# Altium PCB gamekun_H7A3.PcbDoc (part 1 of 2)
Units mil, origin at the board's own origin, x right, y up, seen from the top; angles counter-clockwise.
Board outline 2995 x 3909 mil, 4 copper layers (Top Layer, Layer 1, Layer 2, Bottom Layer), stack 23.756 mil thick; 100 components, 120 nets, 610 pads, 229 vias.
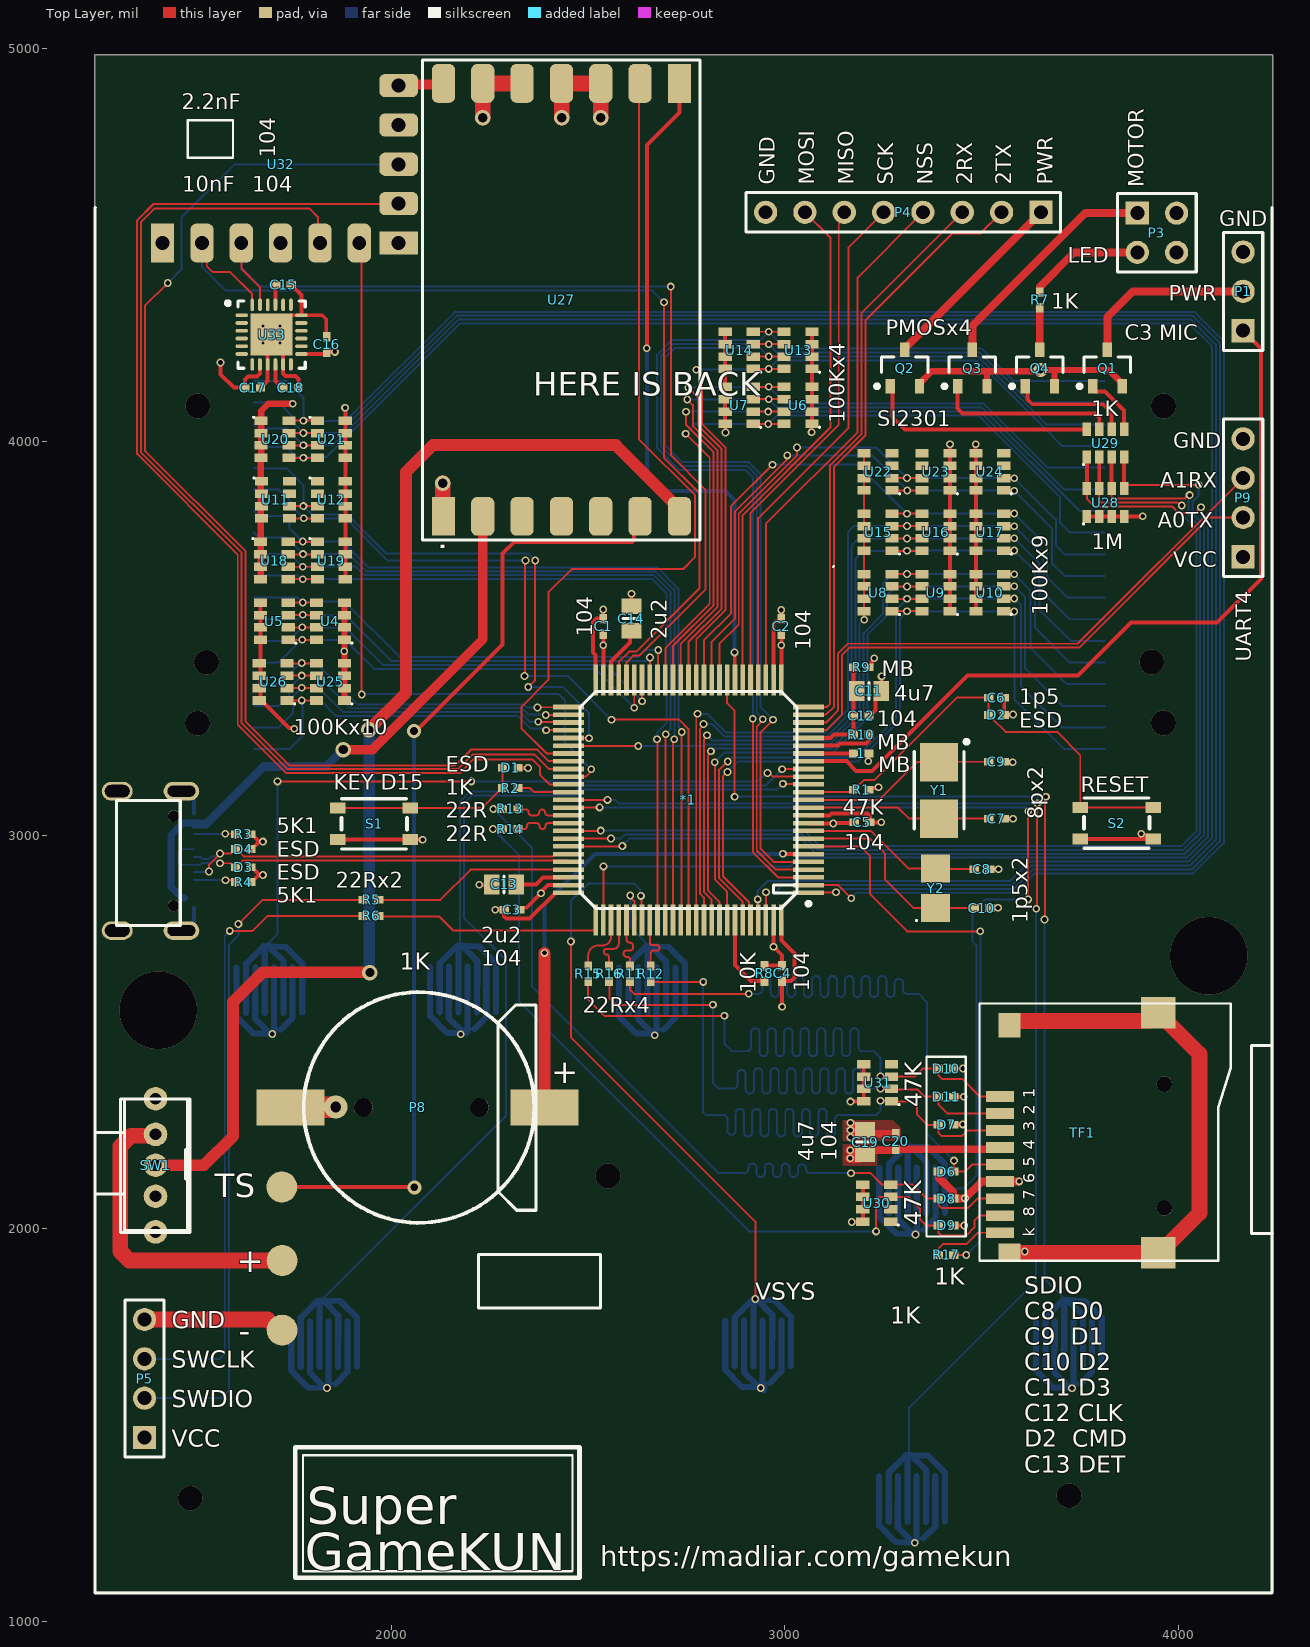
[diagram p0: Top Layer view]
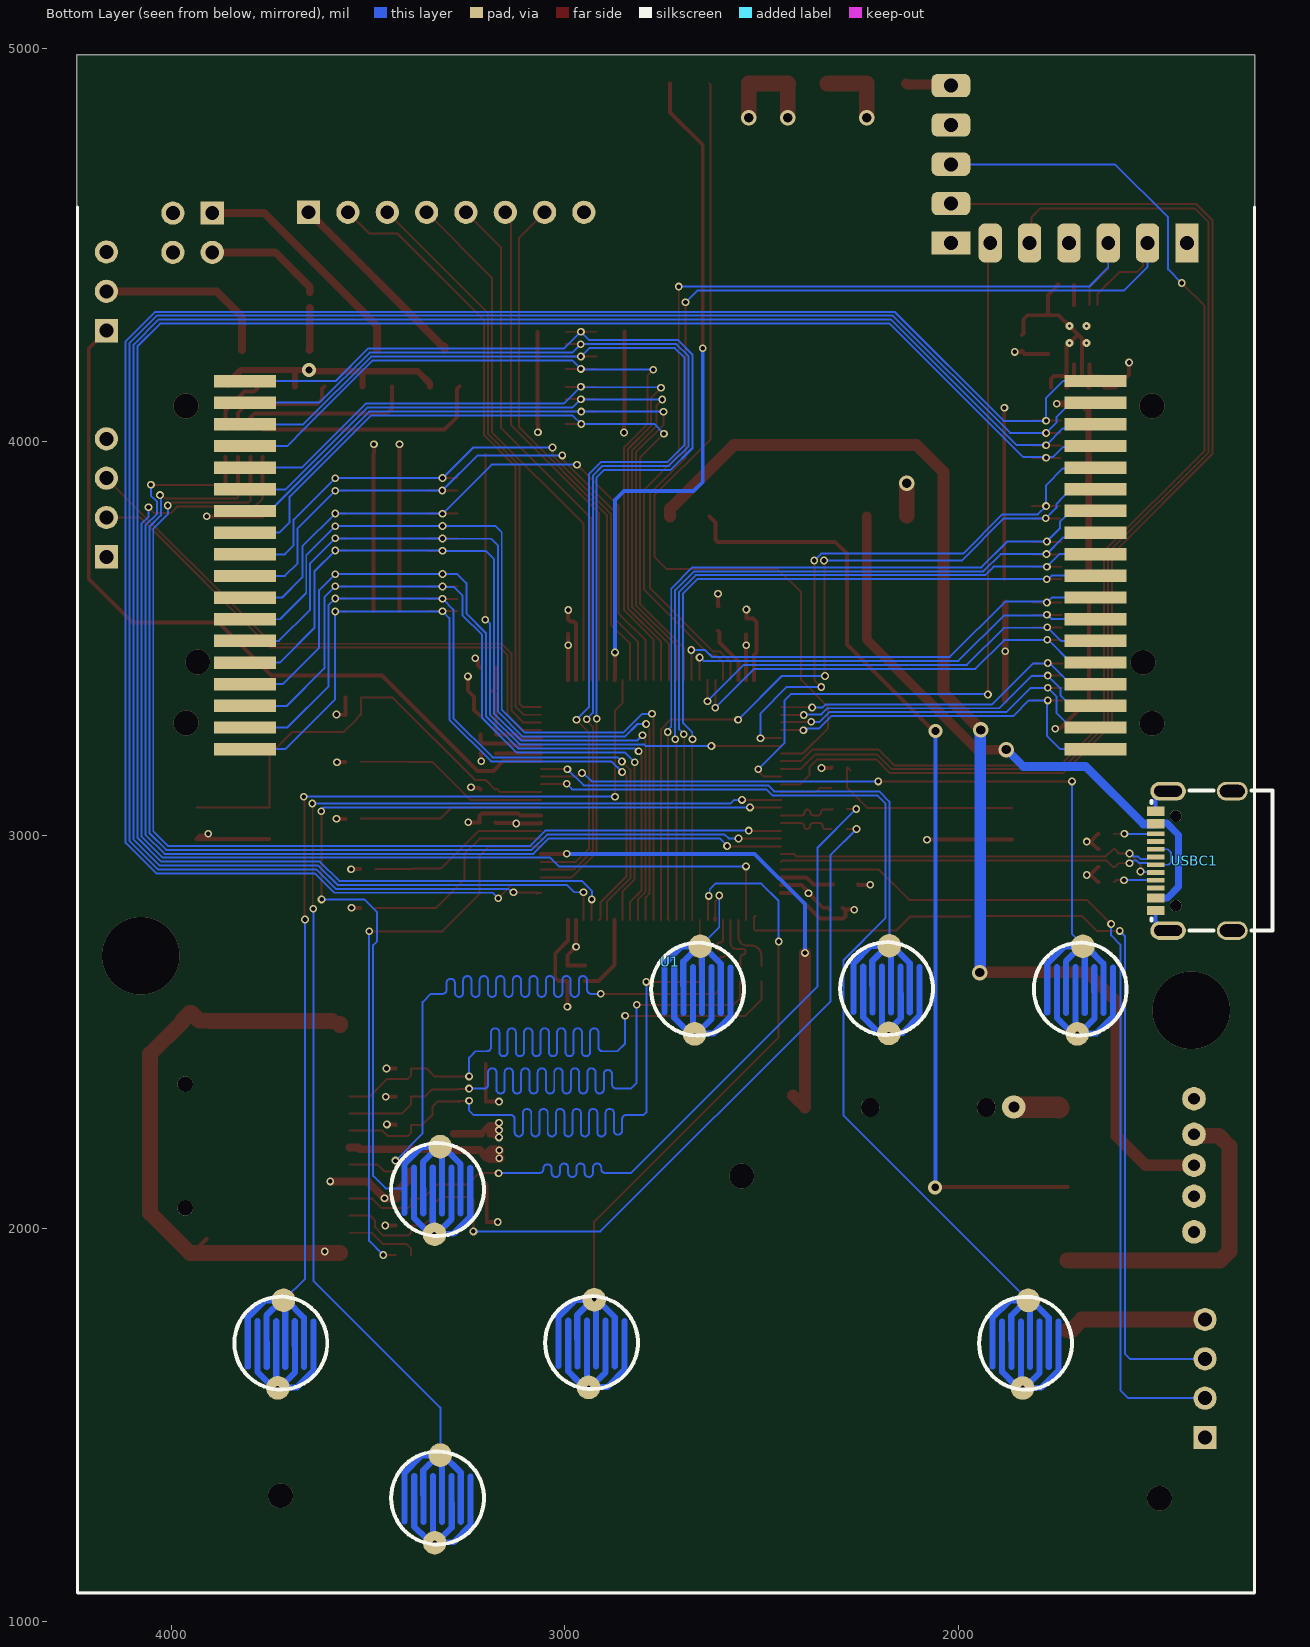
[diagram p1: Bottom Layer view, seen from below]
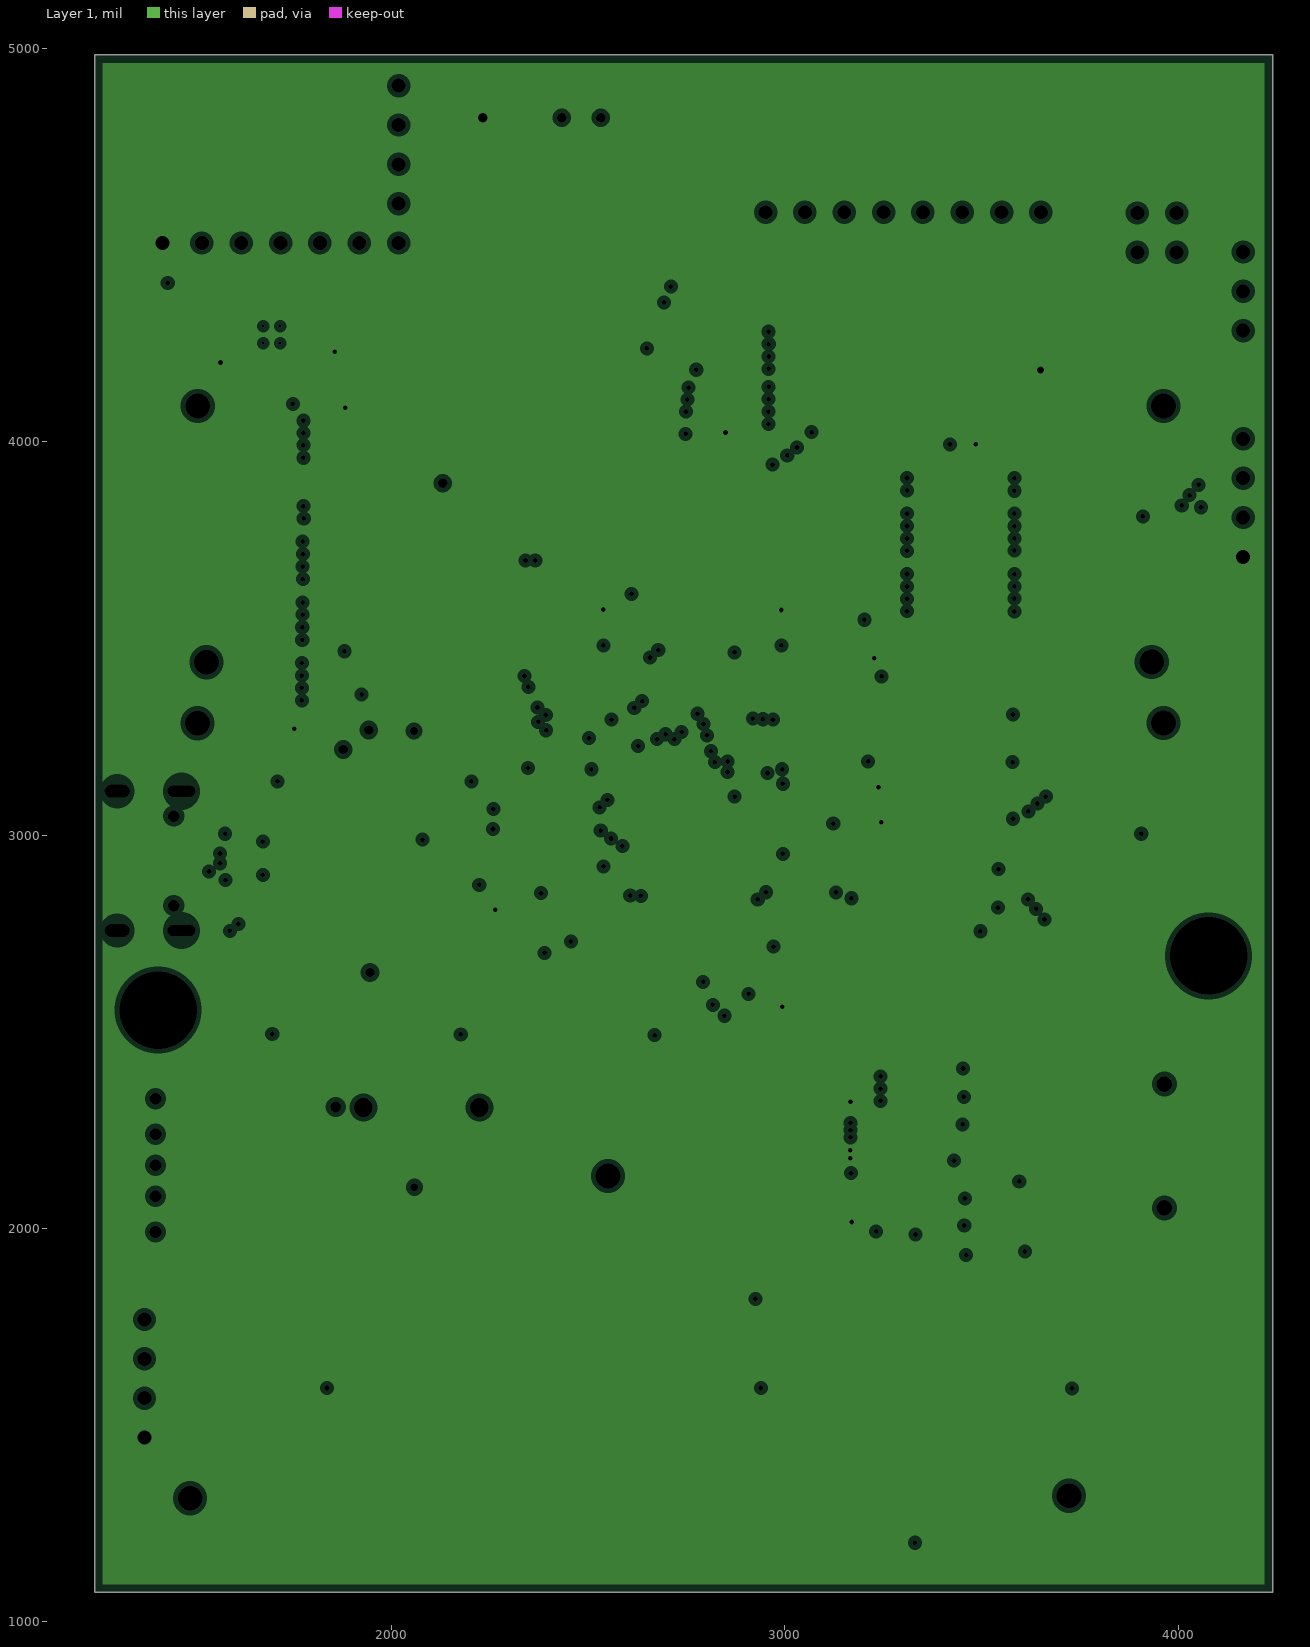
[diagram p2: Layer 1, clearances drawn from the general rule]
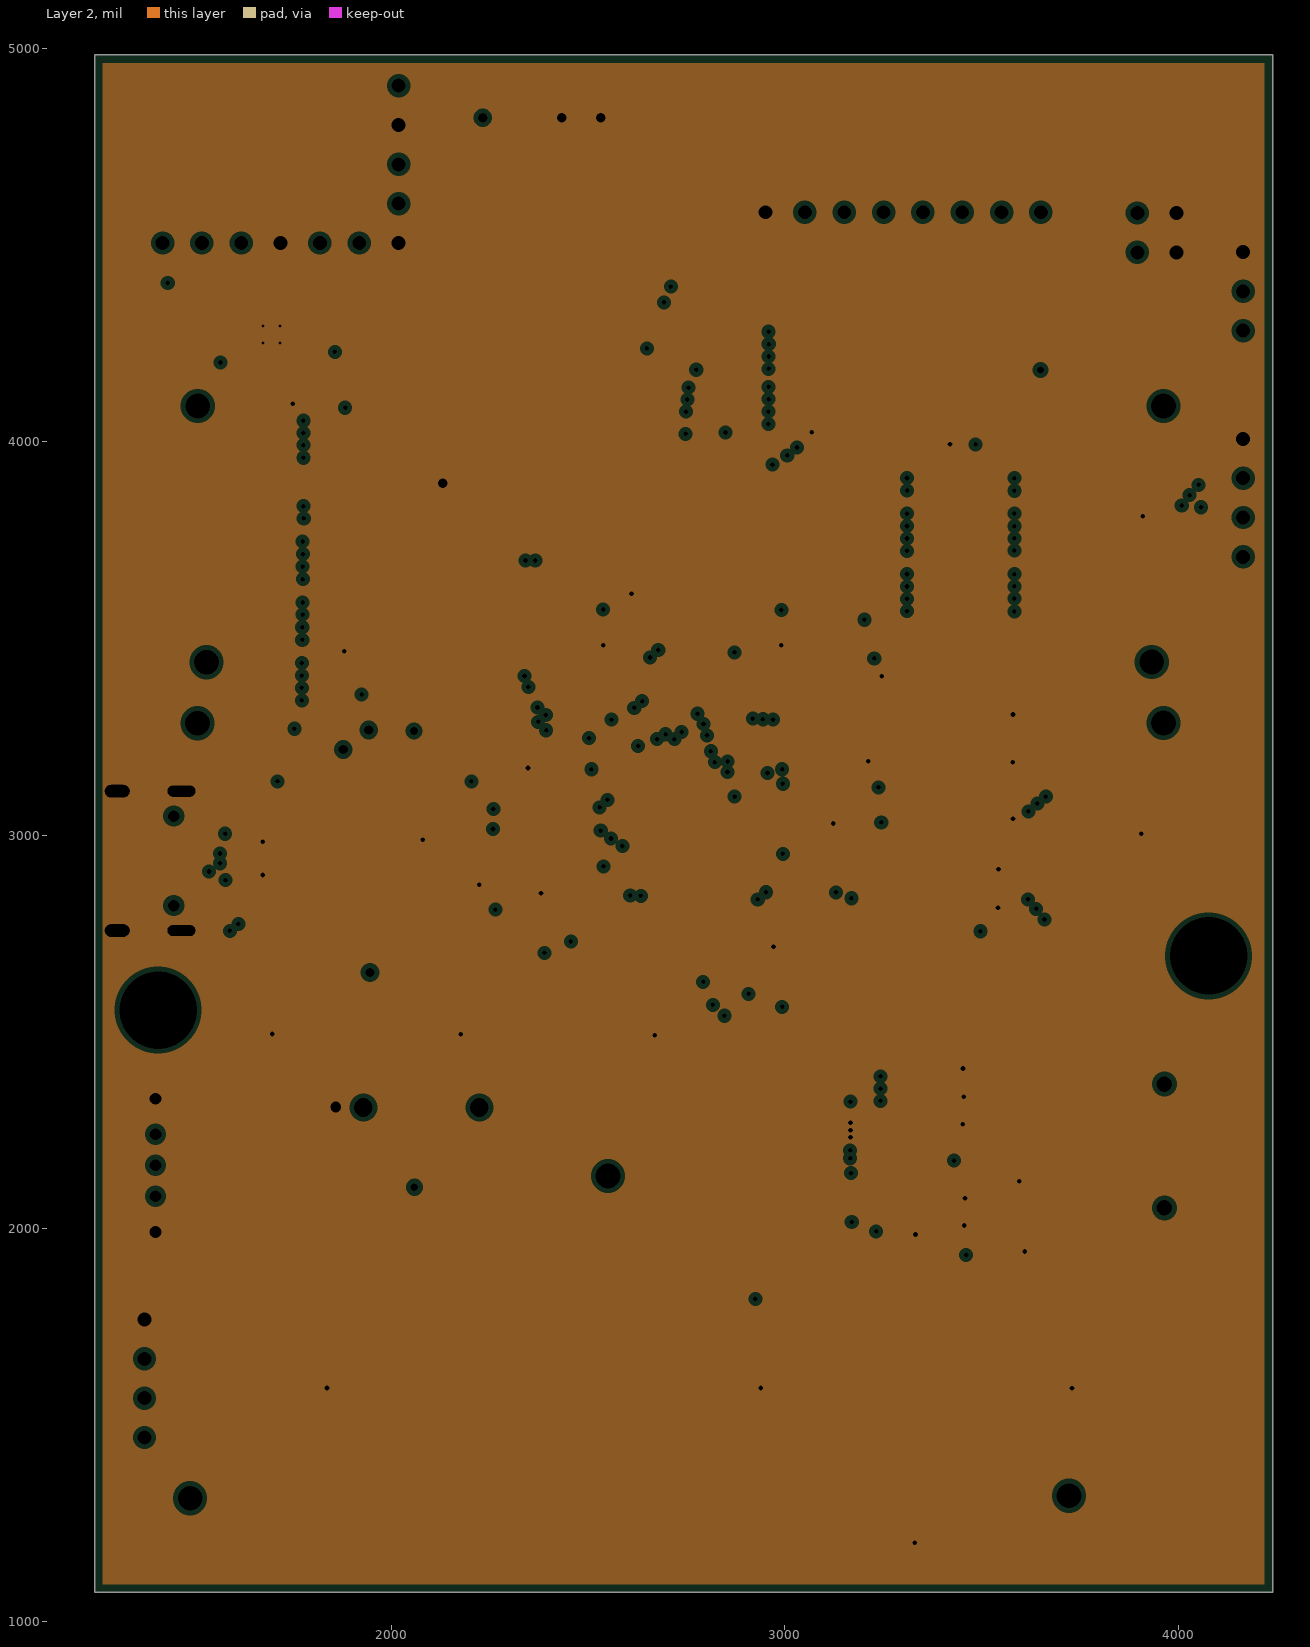
[diagram p3: Layer 2, clearances drawn from the general rule]

## Layer stack, top to bottom
Top Solder: solder mask 0.4, Solder Resist, Dk 3.5
Top Layer: signal copper 1.4
Dielectric 2: prepreg 2.8, PP-006, Dk 4.1
Layer 1: plane copper 1.378, net +3
Dielectric 1: dielectric 12.6, FR-4, Dk 4.8
Layer 2: plane copper 1.378, net GND
Dielectric 3: prepreg 2.8, PP-006, Dk 4.1
Bottom Layer: signal copper 1.4
Bottom Solder: solder mask 0.4, Solder Resist, Dk 3.5

## Board outline
1245,1075 1245,4984 4240,4984 4240,1075

## Design rules (kind name [scope] priority, off if disabled: settings)
Clearance [All] p1: gap=5 ignorepadtopadclearanceinfootprint=FALSE
ComponentClearance [All] p1: gap=0 collisioncheckmode=3 verticalgap=0 showdistances=FALSE
DiffPairsRouting [All] p1: maxlimit=10 minlimit=5 mostfreqgap=5 toplayer_minwidth=5 toplayer_maxwidth=15 toplayer_prefwidth=5 bottomlayer_minwidth=5 bottomlayer_maxwidth=15 bottomlayer_prefwidth=5 maxuncoupledlength=500
Length SD_SLOT [InNetClass('SDIO')] p1: maxlimit=2185 minlimit=2175
Length SDIO_CHIP [InNetClass('SD_CHIP')] p2: maxlimit=155 minlimit=145
PlaneClearance [All] p1: clearance=12
PlaneConnect [All] p1: pad.planeconnectstyle=Relief pad.reliefexpansion=20 pad.reliefentries=4 pad.reliefconductorwidth=16 pad.reliefairgap=10 via.planeconnectstyle=Direct via.reliefexpansion=20 via.reliefentries=4 via.reliefconductorwidth=10 via.reliefairgap=10
PolygonConnect [All] p1: thpad.connectstyle=Relief thpad.reliefconductorwidth=16 thpad.reliefentries=4 thpad.polygonreliefangle="90 Angle" thpad.airgapwidth=10 smdpad.connectstyle=Direct smdpad.reliefconductorwidth=16 smdpad.reliefentries=4 smdpad.polygonreliefangle="90 Angle" smdpad.airgapwidth=10 via.connectstyle=Direct via.reliefconductorwidth=10 via.reliefentries=4 via.polygonreliefangle="90 Angle" via.airgapwidth=10
RoutingVias [All] p1: holewidth=11.81 width=19.68 viastyle="Through Hole" minholewidth=11.81 minwidth=19.68 maxholewidth=39330.71 maxwidth=-35835.31
SolderMaskExpansion [All] p1: expansion=4 istentingtop=FALSE
UnRoutedNet [All] p1: checkbadconnections=TRUE
Width [All] p1: maxlimit=1000 minlimit=5 preferedwidth=5
25 further rules are at their usual default settings.

## Classes and differential pairs
net class SDIO: SD_SLOT_CLK SD_SLOT_CMD SD_SLOT_D0 SD_SLOT_D1 SD_SLOT_D2 SD_SLOT_D3
net class SD_CHIP: SD_CK SD_CMD SD_D0 SD_D1 SD_D2 SD_D3
component class sensor: C15 C16 C17 C18 U32 U33
component class sd_slot: C19 C20 D6 D7 D8 D9 D10 D11 R11 R12 R13 R14 R15 R16 R17 TF1 U30 U31
component class screen: U1 U4 U5 U6 U7 U8 U9 U10 U11 U12 U13 U14 U15 U16 U17 U18 U19 U20 U21 U22 U23 U24 U25 U26
component class main_chip: 1 *1 + - C1 C2 C3 C4 C5 C6 C7 C8 C9 C10 C11 C12 C13 C14 D1 D2 D3 D4 P1 P3 P4 P5 P8 P9 Q1 Q2 Q3 Q4 R1 R2 R3 R4 R5 R6 R7 R8 R9 R10 S1 S2 SW1 TS U27 U28 U29 USBC1 Y1 Y2
differential pair UBS: +UBS_P -UBS_N

## Components (designator, comment, footprint, x,y, rotation, side; value= is the part's Value field where it differs from the comment)
1 "Res1" 0402 3194,3208 r180 top value=0
*1 "stm32h7A3" CQFP-100 2755,3090 r180 top locked
+ "Point" POINT 1722,1919 r0 top (schematic designator P7)
- "Point" POINT 1722,1742 r0 top (schematic designator P2)
C1 "Cap" 0402 2538,3531 r270 top value=100nF
C2 "Cap" 0402 2991,3531 r270 top value=100nF
C3 "Cap" 0402 2306,2811 r0 top value=100nF
C4 "Cap" 0402 2993,2649 r90 top value=100nF
C5 "Cap" 0402 3196,3033 r180 top value=100nF
C6 "Cap" 0402 3538,3350 r0 top value=1.5pF
C7 "Cap" 0402 3538,3042 r180 top value=8pF
C8 "Cap" 0402 3501,2914 r0 top value=1,5pF
C9 "Cap" 0402 3538,3187 r180 top value=8pF
C10 "Cap" 0402 3501,2815 r0 top value=1.5pF
C11 "Cap" 6-0805_L 3213.68,3367 r180 top value=1uF
C12 "Cap" 0402 3194,3304 r180 top value=100nF
C13 "Cap" 6-0805_L 2286,2875 r0 top value=2.2uF
C14 "Cap" 6-0805_L 2610,3551 r90 top value=2.2uF
C15 "Cap" 0402 1725,4400 r180 top value=2.2nF
C16 "Cap" 0402 1835,4248 r90 top value=100nF
C17 "Cap" 0402 1647,4138 r0 top value=10nF
C18 "Cap" 0402 1744,4138 r0 top value=100nF
C19 "Cap" 6-0805_L 3204,2220 r270 top value=1uF
C20 "Cap" 0402 3282,2221.69 r270 top value=100nF
D1 "MKESD0402MS05" 0402 2302,3172 r0 top
D2 "MKESD0402MS05" 0402 3538,3306 r0 top
D3 "MKESD0402MS05" 0402 1623,2919 r0 top
D4 "MKESD0402MS05" 0402 1623,2965 r0 top
D6 "MKESD0402MS05" 0402 3410,2145 r180 top
D7 "MKESD0402MS05" 0402 3410,2264 r0 top
D8 "MKESD0402MS05" 0402 3410,2076.5 r0 top
D9 "MKESD0402MS05" 0402 3410,2008 r0 top
D10 "MKESD0402MS05" 0402 3410,2407 r0 top
D11 "MKESD0402MS05" 0402 3410,2335.5 r0 top
P1 "MicroPhone" HDR1X3 4165,4283 r90 top
P3 "Header 2X2" HDR2X2 3896,4582 r270 top
P4 "M5Stamp" HDR1X8 3651,4584 r180 top
P5 "SW-DEBUG" HDR1X4 1372,1469 r90 top
P8 "Battery slot" CR1220-SLOT 2070,2308 r0 top
P9 "UART4" HDR1X4 4165,3708 r90 top
Q1 "PMOS" SOT23-3 3820,4188 r90 top
Q2 "PMOS" SOT23-3 3305,4188 r90 top
Q3 "PMOS" SOT23-3 3476.67,4188 r90 top
Q4 "PMOS" SOT23-3 3648.33,4188 r90 top
R1 "Res1" 0402 3194,3116 r180 top value=47K
R2 "Res1" 0402 2302,3120 r180 top value=1K
R3 "Res1" 0402 1623,3003 r180 top value=5.1K
R4 "Res1" 0402 1623,2881 r0 top value=5.1K
R5 "Res1" 0402 1948,2836 r180 top value=22R
R6 "Res1" 0402 1948,2795 r180 top value=22R
R7 "Res1" 0402 3648,4361 r270 top value=1K
R8 "Res1" 0402 2948,2649 r270 top value=10K
R9 "magnetic bead" 0402 3194,3427 r0 top value="1K 100Mhz"
R10 "Res1" 0402 3194,3256 r0 top value=0
R11 "Res1" 0402 2606,2648 r90 top locked value=22R
R12 "Res1" 0402 2659,2648 r90 top locked value=22R
R13 "Res1" 0402 2302,3067 r0 top locked value=22R
R14 "Res1" 0402 2302,3016 r0 top locked value=22R
R15 "Res1" 0402 2500,2648 r90 top locked value=22R
R16 "Res1" 0402 2553,2648 r90 top locked value=22R
R17 "Res1" 0402 3410,1933 r0 top value=1K
S1 "SW-PB" BTN_0304 1958,3031 r180 top
S2 "SW-PB" BTN_0304 3846,3033 r180 top
SW1 "SK-12D07VG3" SWITCH 1400,2161 r0 top
TF1 "TF-SLOT" "Micro SD" 3965,2210 r90 top locked
TS "Point" POINT 1721,2106 r0 top (schematic designator P6)
U1 "connector" KUNBORAD 2722.24,2721.34 r180 bottom locked
U4 "RES_BATCH" 0603_RES_BATCH 1844.62,3544.25 r180 top
U5 "RES_BATCH" 0603_RES_BATCH 1702,3544.25 r180 top
U6 "RES_BATCH" 0603_RES_BATCH 3033.57,4093 r180 top
U7 "RES_BATCH" 0603_RES_BATCH 2884,4093 r180 top
U8 "RES_BATCH" 0603_RES_BATCH 3237,3617 r180 top
U9 "RES_BATCH" 0603_RES_BATCH 3384,3617 r180 top
U10 "RES_BATCH" 0603_RES_BATCH 3521,3617 r180 top
U11 "RES_BATCH" 0603_RES_BATCH 1705,3852.75 r0 top
U12 "RES_BATCH" 0603_RES_BATCH 1847,3852.75 r0 top
U13 "RES_BATCH" 0603_RES_BATCH 3033.57,4233 r180 top
U14 "RES_BATCH" 0603_RES_BATCH 2884,4233 r180 top
U15 "RES_BATCH" 0603_RES_BATCH 3237,3770.5 r180 top
U16 "RES_BATCH" 0603_RES_BATCH 3384,3770.5 r180 top
U17 "RES_BATCH" 0603_RES_BATCH 3521,3770.5 r180 top
U18 "RES_BATCH" 0603_RES_BATCH 1702,3698.5 r0 top
U19 "RES_BATCH" 0603_RES_BATCH 1847,3698.5 r0 top
U20 "RES_BATCH" 0603_RES_BATCH 1704,4007 r0 top
U21 "RES_BATCH" 0603_RES_BATCH 1847,4007 r0 top
U22 "RES_BATCH" 0603_RES_BATCH 3237,3924 r180 top
U23 "RES_BATCH" 0603_RES_BATCH 3384,3924 r180 top
U24 "RES_BATCH" 0603_RES_BATCH 3521,3924 r180 top
U25 "RES_BATCH" 0603_RES_BATCH 1844.62,3390 r180 top
U26 "RES_BATCH" 0603_RES_BATCH 1699,3390 r180 top
U27 "my_power" MY_POWER 2446,4040 r90 top
U28 "1M" 0603_RES_BATCH 3815,3846 r90 top
U29 "1K" 0603_RES_BATCH 3815,3997 r90 top
U30 "47K*4" 0603_RES_BATCH 3233.62,2064.75 r180 top
U31 "47K*4" 0603_RES_BATCH 3236,2371 r180 top
U32 "SP2563" SP2563 1667.8,4504.62 r90 top locked
U33 "MPU6050" ? 1695,4273 r0 top
USBC1 "TYPE-C 3.1 母头 16P" USB-C-SMD_16P 1400,2935 r270 bottom locked
Y1 "XTAL 25M 9pF" XTAL_5032_25MHZ 3392,3114 r270 top
Y2 "XTAL 32.768K 6pF" XTAL_3215_32768 3383,2865 r90 top

## Footprints (in the part's own frame and the unit in brackets; to place one, negate y for a bottom-side part, rotate by r counter-clockwise, add the part's x,y. Pads: shape width x height; smd on the part's side, far side on the other; paste and mask are expansions set on the pad)
6-0805_L [mm] "Chip Resistor, Body 2.0x1.2mm, IPC High Density"
  rect 1x1.3 smd: 1(-0.8,0) 2(0.8,0)
  silkscreen extent 0,-0.55 0,0.55, body extent -1.07,-0.7 1.07,0.7, height 0.7
0402 [mm] "Chip Capacitor, Body 1.0x0.5mm, IPC High Density"
  rect 0.6x0.5 smd: 1(-0.5,0) 2(0.5,0)
  body extent -0.55,-0.3 0.55,0.3, height 1.3
0603_RES_BATCH [mm]
  rect 0.85x0.55 smd: 1(-0.9,1.2) 2(-0.9,0.4) 3(-0.9,-0.4) 4(-0.9,-1.2) 5(0.9,-1.2) 6(0.9,-0.4) 7(0.9,0.4) 8(0.9,1.2)
  silkscreen extent -1.44,1.36 -1.34,1.46, body extent -0.8,-1.6 0.8,1.6, height 0.6
BTN_0304 [mil]
  rect 39.37x27.56 smd: 1(-90,42) 1(95,42) 2(-90,-38) 2(95,-38)
  silkscreen extent -81,-62 85,66, body extent -80,-62 85,66, height 79
CQFP-100 [mm]
  rect 2x0.3 smd: 1(-7.75,6) 2(-7.75,5.5) 3(-7.75,5) 4(-7.75,4.5) 5(-7.75,4) 6(-7.75,3.5) 7(-7.75,3) 8(-7.75,2.5) 9(-7.75,2) 10(-7.75,1.5) 11(-7.75,1) 12(-7.75,0.5) 13(-7.75,0) 14(-7.75,-0.5) 15(-7.75,-1) 16(-7.75,-1.5) 17(-7.75,-2) 18(-7.75,-2.5) 19(-7.75,-3) 20(-7.75,-3.5) 21(-7.75,-4) 22(-7.75,-4.5) 23(-7.75,-5) 24(-7.75,-5.5) 25(-7.75,-6) 51(7.75,-6) 52(7.75,-5.5) 53(7.75,-5) 54(7.75,-4.5) 55(7.75,-4) 56(7.75,-3.5) 57(7.75,-3) 58(7.75,-2.5) 59(7.75,-2) 60(7.75,-1.5) 61(7.75,-1) 62(7.75,-0.5) 63(7.75,0) 64(7.75,0.5) 65(7.75,1) 66(7.75,1.5) 67(7.75,2) 68(7.75,2.5) 69(7.75,3) 70(7.75,3.5) 71(7.75,4) 72(7.75,4.5) 73(7.75,5) 74(7.75,5.5) 75(7.75,6)
  rect 0.3x2 smd: 26(-6,-7.75) 27(-5.5,-7.75) 28(-5,-7.75) 29(-4.5,-7.75) 30(-4,-7.75) 31(-3.5,-7.75) 32(-3,-7.75) 33(-2.5,-7.75) 34(-2,-7.75) 35(-1.5,-7.75) 36(-1,-7.75) 37(-0.5,-7.75) 38(0,-7.75) 39(0.5,-7.75) 40(1,-7.75) 41(1.5,-7.75) 42(2,-7.75) 43(2.5,-7.75) 44(3,-7.75) 45(3.5,-7.75) 46(4,-7.75) 47(4.5,-7.75) 48(5,-7.75) 49(5.5,-7.75) 50(6,-7.75) 76(6,7.75) 77(5.5,7.75) 78(5,7.75) 79(4.5,7.75) 80(4,7.75) 81(3.5,7.75) 82(3,7.75) 83(2.5,7.75) 84(2,7.75) 85(1.5,7.75) 86(1,7.75) 87(0.5,7.75) 88(0,7.75) 89(-0.5,7.75) 90(-1,7.75) 91(-1.5,7.75) 92(-2,7.75) 93(-2.5,7.75) 94(-3,7.75) 95(-3.5,7.75) 96(-4,7.75) 97(-4.5,7.75) 98(-5,7.75) 99(-5.5,7.75) 100(-6,7.75)
  silkscreen extent -7.88,-7 7,7, body extent -7.15,-7.15 7.15,7.15, height 3.1
CR1220-SLOT [mm]
  rect 4.4x2.3 smd: 1(-8.295,0) 2(8.1,0)
  round 1.2 hole 1.2: 11(-3.6,0) 11(3.9,0)
  silkscreen extent -7.45,-7.45 7.56,7.45
HDR1X3 [mm] "Connector; Header; 3 Position"
  rect 1.5x1.5 hole 0.9: 1(0,0)
  round 1.5 hole 0.9: 2(2.54,0) 3(5.08,0)
  silkscreen extent -1.27,-1.27 6.35,1.27
HDR1X4 [mm] "Connector; Header; 4 Position"
  rect 1.5x1.5 hole 0.9: 1(0,0)
  round 1.5 hole 0.9: 2(2.54,0) 3(5.08,0) 4(7.62,0)
  silkscreen extent -1.27,-1.27 8.89,1.27
HDR1X8 [mm] "Connector; Header; 8 Position"
  rect 1.5x1.5 hole 0.9: 1(0,0)
  round 1.5 hole 0.9: 2(2.54,0) 3(5.08,0) 4(7.62,0) 5(10.16,0) 6(12.7,0) 7(15.24,0) 8(17.78,0)
  silkscreen extent -1.27,-1.27 19.05,1.27
HDR2X2 [mm] "Connector; Header; 2x2 Position"
  rect 1.5x1.5 hole 0.9: 1(0,0)
  round 1.5 hole 0.9: 2(0,2.54) 3(2.54,0) 4(2.54,2.54)
  silkscreen extent -1.27,-1.27 3.81,3.81
KUNBORAD [mm]
  rect 4x0.8 smd: 1(-27.7,36.411) 2(-27.7,35.012) 3(-27.7,33.614) 4(-27.7,32.216) 5(-27.7,30.818) 6(-27.7,29.419) 7(-27.7,28.021) 8(-27.7,26.623) 9(-27.7,25.225) 10(-27.7,23.826) 11(-27.7,22.428) 12(-27.7,21.03) 13(-27.7,19.632) 14(-27.7,18.234) 15(-27.7,16.835) 16(-27.7,15.437) 17(-27.7,14.039) 18(-27.7,12.641) 19(27.235,12.645) 20(27.235,14.043) 21(27.235,15.441) 22(27.235,16.84) 23(27.235,18.238) 24(27.235,19.636) 25(27.235,21.034) 26(27.235,22.433) 27(27.235,23.831) 28(27.235,25.229) 29(27.235,26.627) 30(27.235,28.026) 31(27.235,29.424) 32(27.235,30.822) 33(27.235,32.22) 34(27.235,33.619) 35(27.235,35.017) 36(27.235,36.415)
  round 1.524 smd: 101(-15.095,-13.025) 102(-15.46,-18.685) 103(-15.085,-32.945) 104(-15.45,-38.605) 105(-25.21,-22.945) 106(-25.575,-28.605) 107(-5.145,-22.914) 108(-5.51,-28.574) 109(1.701,-0.089) 110(1.336,-5.749) 111(13.911,-0.054) 112(13.881,-5.714) 113(26.416,-0.084) 114(26.051,-5.744) 115(22.881,-22.954) 116(22.516,-28.614)
  Top Layer lines w0.2: 26.611,-0.084 26.416,-0.084 26.301,-0.084 ; 26.166,-5.744 26.051,-5.744 ; 25.826,-5.464 25.496,-5.464 ; 24.731,-4.699 24.731,-4.619 ; 23.076,-22.954 22.881,-22.954 22.766,-22.954 ; 22.631,-28.614 22.516,-28.614 ; 22.291,-28.334 21.961,-28.334 ; 21.196,-27.569 21.196,-27.489 ; 14.106,-0.054 13.911,-0.054 13.796,-0.054 ; 13.661,-5.714 13.546,-5.714 ; 13.321,-5.434 12.991,-5.434 ; 12.226,-4.669 12.226,-4.589 ; 1.896,-0.089 1.701,-0.089 1.586,-0.089 ; 1.451,-5.749 1.336,-5.749 ; 1.111,-5.469 0.781,-5.469 ; 0.016,-4.704 0.016,-4.624 ; -4.95,-22.914 -5.145,-22.914 -5.26,-22.914 ; -5.395,-28.574 -5.51,-28.574 ; -5.735,-28.294 -6.065,-28.294 ; -6.83,-27.529 -6.83,-27.449 ; -14.89,-32.945 -15.085,-32.945 -15.2,-32.945 ; -14.9,-13.025 -15.095,-13.025 -15.21,-13.025 ; -15.335,-38.605 -15.45,-38.605 ; -15.345,-18.685 -15.46,-18.685 ; -15.675,-38.325 -16.005,-38.325 ; -15.685,-18.405 -16.015,-18.405 ; -16.77,-37.56 -16.77,-37.48 ; -16.78,-17.64 -16.78,-17.56 ; -25.015,-22.945 -25.21,-22.945 -25.325,-22.945 ; -25.46,-28.605 -25.575,-28.605 ; -25.8,-28.325 -26.13,-28.325 ; -26.895,-27.56 -26.895,-27.48
  Top Layer lines w0.4: 28.361,-1.464 28.361,-4.619 27.277,-5.703 26.051,-5.744 ; 27.736,-4.384 27.736,-1.209 26.611,-0.084 ; 27.139,-1.439 27.151,-4.759 26.166,-5.744 ; 26.526,-4.389 26.526,-1.209 26.526,-0.194 ; 26.416,-0.084 25.19,-0.125 24.106,-1.209 24.106,-4.364 ; 26.301,-0.084 25.316,-1.069 25.328,-4.389 ; 25.941,-5.634 25.941,-4.619 25.941,-1.439 ; 25.496,-5.464 24.731,-4.699 ; 24.826,-24.334 24.826,-27.489 23.742,-28.573 22.516,-28.614 ; 24.731,-4.619 24.731,-1.444 ; 24.201,-27.254 24.201,-24.079 23.076,-22.954 ; 23.604,-24.309 23.616,-27.629 22.631,-28.614 ; 22.991,-27.259 22.991,-24.079 22.991,-23.064 ; 22.881,-22.954 21.655,-22.995 20.571,-24.079 20.571,-27.234 ; 22.766,-22.954 21.781,-23.939 21.793,-27.259 ; 22.406,-28.504 22.406,-27.489 22.406,-24.309 ; 21.961,-28.334 21.196,-27.569 ; 21.196,-27.489 21.196,-24.314 ; 15.856,-1.434 15.856,-4.589 14.772,-5.673 13.546,-5.714 ; 15.231,-4.354 15.231,-1.179 14.106,-0.054 ; 14.634,-1.409 14.646,-4.729 13.661,-5.714 ; 14.021,-4.359 14.021,-1.179 14.021,-0.164 ; 13.911,-0.054 12.685,-0.095 11.601,-1.179 11.601,-4.334 ; 13.796,-0.054 12.811,-1.039 12.823,-4.359 ; 13.436,-5.604 13.436,-4.589 13.436,-1.409 ; 12.991,-5.434 12.226,-4.669 ; 12.226,-4.589 12.226,-1.414 ; 3.646,-1.469 3.646,-4.624 2.562,-5.708 1.336,-5.749 ; 3.021,-4.389 3.021,-1.214 1.896,-0.089 ; 2.424,-1.444 2.436,-4.764 1.451,-5.749 ; 1.811,-4.394 1.811,-1.214 1.811,-0.199 ; 1.701,-0.089 0.475,-0.13 -0.609,-1.214 -0.609,-4.369 ; 1.586,-0.089 0.601,-1.074 0.613,-4.394 ; 1.226,-5.639 1.226,-4.624 1.226,-1.444 ; 0.781,-5.469 0.016,-4.704 ; 0.016,-4.624 0.016,-1.449 ; -3.2,-24.294 -3.2,-27.449 -4.284,-28.533 -5.51,-28.574 ; -3.825,-27.214 -3.825,-24.039 -4.95,-22.914 ; -4.422,-24.269 -4.41,-27.589 -5.395,-28.574 ; -5.035,-27.219 -5.035,-24.039 -5.035,-23.024 ; -5.145,-22.914 -6.371,-22.955 -7.455,-24.039 -7.455,-27.194 ; -5.26,-22.914 -6.245,-23.899 -6.233,-27.219 ; -5.62,-28.464 -5.62,-27.449 -5.62,-24.269 ; -6.065,-28.294 -6.83,-27.529 ; -6.83,-27.449 -6.83,-24.274 ; -13.14,-34.325 -13.14,-37.48 -14.224,-38.564 -15.45,-38.605 ; -13.15,-14.405 -13.15,-17.56 -14.234,-18.644 -15.46,-18.685 ; -13.765,-37.245 -13.765,-34.07 -14.89,-32.945 ; -13.775,-17.325 -13.775,-14.15 -14.9,-13.025 ; -14.362,-34.3 -14.35,-37.62 -15.335,-38.605 ; -14.372,-14.38 -14.36,-17.7 -15.345,-18.685 ; -14.975,-37.25 -14.975,-34.07 -14.975,-33.055 ; -14.985,-17.33 -14.985,-14.15 -14.985,-13.135 ; -15.085,-32.945 -16.311,-32.986 -17.395,-34.07 -17.395,-37.225 ; -15.095,-13.025 -16.321,-13.066 -17.405,-14.15 -17.405,-17.305 ; -15.2,-32.945 -16.185,-33.93 -16.173,-37.25 ; -15.21,-13.025 -16.195,-14.01 -16.183,-17.33 ; -15.56,-38.495 -15.56,-37.48 -15.56,-34.3 ; -15.57,-18.575 -15.57,-17.56 -15.57,-14.38 ; -16.005,-38.325 -16.77,-37.56 ; -16.015,-18.405 -16.78,-17.64 ; -16.77,-37.48 -16.77,-34.305 ; -16.78,-17.56 -16.78,-14.385 ; -23.265,-24.325 -23.265,-27.48 -24.349,-28.564 -25.575,-28.605 ; -23.89,-27.245 -23.89,-24.07 -25.015,-22.945 ; -24.487,-24.3 -24.475,-27.62 -25.46,-28.605 ; -25.1,-27.25 -25.1,-24.07 -25.1,-23.055 ; -25.21,-22.945 -26.436,-22.986 -27.52,-24.07 -27.52,-27.225 ; -25.325,-22.945 -26.31,-23.93 -26.298,-27.25 ; -25.685,-28.495 -25.685,-27.48 -25.685,-24.3 ; -26.13,-28.325 -26.895,-27.56 ; -26.895,-27.48 -26.895,-24.305
  silkscreen extent -38.52,-41.85 37.49,47.63
"Micro SD" [mm] "淘宝ID:黄晶宝石"
  round 1 hole 1 unplated: 0(-4,0) 0(4,0)
  rect 0.7x1.8 smd: 1(3.2,10.627) 2(2.1,10.627) 3(1,10.627) 4(-0.1,10.627) 5(-1.2,10.627) 6(-2.3,10.627) 7(-3.4,10.627) 8(-4.5,10.627) 9(-5.6,10.627)
  rect 2.032x2.2 smd: 10(-6.9,0.4) 10(8.6,0.4)
  rect 1.2x1.4 smd: 10(-6.9,10)
  rect 1.6x1.4 smd: 10(7.8,10)
  silkscreen extent -7.4,-4.28 9.2,11.94, body extent -7.05,-4 8.95,11.25, height 2
MY_POWER [mm]
  rect 2.5x1.5 smd: 1(-5.819,7.975) 8(22.14,-7.265)
  rrect50% 2.5x1.5 smd: 2(-5.819,5.435) 3(-5.819,2.895) 4(-5.819,0.355) 5(-5.819,-2.185) 6(-5.819,-4.725) 7(-5.819,-7.265) 9(22.14,-4.725) 10(22.14,-2.185) 11(22.14,0.355) 12(22.14,2.895) 13(22.14,5.435) 14(22.14,7.975)
  silkscreen extent -7.34,-8.58 23.66,9.33, body extent -7.34,-8.54 23.63,9.33, height 2
POINT [mm]
  round 2 smd: 1(0,0)
SOT23-3 [mm] "SOT23, 3-Leads, Body 2.90x2.45mm, Pitch 0.95mm, IPC Medium Density"
  rect 0.95x0.6 smd: 1(-1.175,0.95) 2(-1.175,-0.95) 3(1.175,0)
  silkscreen extent -1.3,-1.5 0.7,1.92, body extent -0.7,-1.5 0.7,1.5, height 1.1
SP2563 [mm]
  rect 2.5x1.5 hole 0.9: 1(0.035,6.345)
  rrect50% 2.5x1.5 hole 0.9: 2(0.035,3.805) 3(0.035,1.265) 4(0.035,-1.275) 5(0.035,-3.815) 6(0.035,-6.355)
  rect 1.5x2.5 hole 0.9: 7(0.035,-8.895)
  rrect50% 1.5x2.5 hole 0.9: 8(2.575,-8.895) 9(5.115,-8.895) 10(7.655,-8.895) 11(10.195,-8.895)
SWITCH [mil]
  round 60 hole 30: 1(0,78.74) 2(0,0) 3(0,-78.74) 4(0,-169.29) 4(0,169.29)
  silkscreen extent -89,-171 88,169
USB-C-SMD_16P [mm] "封装库来自淘宝ID:黄晶宝石"
  oval 1.2x2.3 hole 0.7 slot 1.8 at 90 deg: 0(-4.5,-1.675) 0(4.5,-1.675)
  oval 1.2x2 hole 0.8 slot 1.6 at 90 deg: 0(-4.5,2.475) 0(4.5,2.475)
  rect 0.3x1.15 smd: A1(3.35,-2.473) A4(2.55,-2.471) A5(1.25,-2.475) A6(0.25,-2.475) A7(-0.25,-2.473) A9(-2.55,-2.475) A12(-3.35,-2.475) B1(-3.05,-2.475) B4(-2.25,-2.475) B5(-1.75,-2.475) B6(-0.75,-2.475) B7(0.75,-2.473) B9(2.25,-2.471) B12(3.05,-2.473)
  rect 0.3x1.148 smd: A8(1.75,-2.475) B8(-1.25,-2.475)
  round 0.75 hole 0.75 unplated: ""(-2.89,-1.175) ""(2.89,-1.175)
  silkscreen extent -4.56,-2.75 4.5,5.08, body extent -4.44,-2.87 4.5,5.03, height 3.25
XTAL_3215_32768 [mm] "Molded Capacitor, 2-Leads, Body 3.20x1.50mm, IPC Medium Density"
  rect 1.8x1.85 smd: 1(-1.275,0) 2(1.275,0)
  silkscreen extent -2.12,1.17 -2.03,1.27, body extent -1.6,-0.75 1.6,0.75, height 1
XTAL_5032_25MHZ [mm] "Molded Capacitor, 2-Leads, Body 5.00x3.20mm, IPC Medium Density"
  rect 2.5x2.45 smd: 1(-1.825,0) 2(1.825,0)
  silkscreen extent -3.27,-1.6 2.5,1.9, body extent -2.5,-1.6 2.5,1.6, height 1.8
? [mm] "QFN, 24-Leads, Body 4.00x4.00mm, Pitch 0.50mm, Thermal Pad 2.70x2.70mm, IPC Medium Density"
  oval 0.8x0.25 smd: 1(-1.925,1.25) 2(-1.925,0.75) 3(-1.925,0.25) 4(-1.925,-0.25) 5(-1.925,-0.75) 6(-1.925,-1.25) 13(1.925,-1.25) 14(1.925,-0.75) 15(1.925,-0.25) 16(1.925,0.25) 17(1.925,0.75) ""(1.925,1.25)
  oval 0.25x0.8 smd: 7(-1.25,-1.925) 8(-0.75,-1.925) 9(-0.25,-1.925) 10(0.25,-1.925) 11(0.75,-1.925) 12(1.25,-1.925) 19(1.25,1.925) 20(0.75,1.925) 21(0.25,1.925) 22(-0.25,1.925) 23(-0.75,1.925) 24(-1.25,1.925)
  rect 2.7x2.7 smd: 25(0,0)
  silkscreen extent -2.95,-2.17 2.17,2.17, body extent -2.02,-2.03 2.03,2.02, height 1

## Part data
1 R1 R2 R3 R4 R5 R6 R7 R8 R10 R11 R12 R13 R14 R15 R16 R17: "Resistor", LatestRevisionDate=17-Jul-2002, LatestRevisionNote="Re-released for DXP Platform.", PackageDescription="Axial Device, Thru-Hole; 2 Leads; 0.3 in Pin Spacing", PackageReference=AXIAL-0.3, Published=8-Jun-2000, Publisher="Altium Limited"
*1: library part stm32h743
C1 C2 C3 C4 C5 C6 C7 C8 C9 C10 C11 C12 C13 C14 C15 C16 C17 C18 C19 C20: "Capacitor", LatestRevisionDate=17-Jul-2002, LatestRevisionNote="Re-released for DXP Platform.", PackageDescription="Radial Cap, Thru-Hole; 2 Leads; 0.3 in Pin Spacing", PackageReference=RAD-0.3, Published=8-Jun-2000, Publisher="Altium Limited"
D1 D2 D3 D4 D6 D7 D8 D9 D10 D11: library part "D Zener", "Zener Diode", LatestRevisionDate=17-Jul-2002, LatestRevisionNote="Re-released for DXP Platform.", PackageDescription="Diode, Thru-Hole; 2 Leads; 0.7 in Pin Spacing", PackageReference=DIODE-0.7, Published=8-Jun-2000, Publisher="Altium Limited"
P1: library part "Header 3", "Header, 3-Pin", LatestRevisionDate=17-Jul-2002, LatestRevisionNote="Re-released for DXP Platform.", Publisher="Altium Limited"
P3: "Header, 2-Pin, Dual row", LatestRevisionDate=17-Jul-2002, LatestRevisionNote="Re-released for DXP Platform.", Publisher="Altium Limited"
P4: library part "Header 8", "Header, 8-Pin", LatestRevisionDate=17-Jul-2002, LatestRevisionNote="Re-released for DXP Platform.", Publisher="Altium Limited"
P5 P9: library part "Header 4", "Header, 4-Pin", LatestRevisionDate=17-Jul-2002, LatestRevisionNote="Re-released for DXP Platform.", Publisher="Altium Limited"
P8: library part "Header 2", "Header, 2-Pin", LatestRevisionDate=17-Jul-2002, LatestRevisionNote="Re-released for DXP Platform.", Publisher="Altium Limited"
R9: library part Res2, "Resistor", LatestRevisionDate=17-Jul-2002, LatestRevisionNote="Re-released for DXP Platform.", PackageDescription="Axial Device, Thru-Hole; 2 Leads; 0.4 in Pin Spacing", PackageReference=AXIAL-0.4, Published=8-Jun-2000, Publisher="Altium Limited"
S1 S2: "Switch", LatestRevisionDate=17-Jul-2002, LatestRevisionNote="Re-released for DXP Platform.", PackageDescription="Switch; 2 Leads", PackageReference=SPST-2, Published=24-Mar-1999, Publisher="Altium Limited"
SW1: library part SW-8.6mm
U1: library part kunboard
U28 U29 U30 U31: library part RES_BATCH
Y1 Y2: library part XTAL, "Crystal Oscillator", LatestRevisionDate=17-Jul-2002, LatestRevisionNote="Re-released for DXP Platform.", PackageDescription="Crystal, Thru-Hole; 2 Leads; Body 3.1 x 8.2 mm (Dia.xH)", PackageReference=R38, Published=8-Jun-2000, Publisher="Altium Limited"

## Via types
v1: diameter 19.68, hole 11.81, Top Layer to Bottom Layer, tented both sides, 203 vias
v2: diameter 62.99, hole 62.99, Top Layer to Bottom Layer, 9 vias
v3: diameter 39.37, hole 23.62, Top Layer to Bottom Layer, tented both sides, 7 vias
v4: diameter 19.68, hole 7.87, Top Layer to Bottom Layer, 4 vias
v5: diameter 196.85, hole 196.85, Top Layer to Bottom Layer, 2 vias
v6: diameter 35.43, hole 19.68, Top Layer to Bottom Layer, tented both sides, 2 vias
v7: diameter 35.43, hole 17.72, Top Layer to Bottom Layer, tented both sides, 1 vias
v8: diameter 59.06, hole 27.56, Top Layer to Bottom Layer, tented both sides, 1 vias

## Nets (pads, with @x,y where several pads share a name; then routed paths per layer and width w, separated by ;. In a path a pad name is that pad's centre, name@x,y a point inside that pad or via, vN(x,y) a via of type N, cw(c..) or ccw(c..) an arc to the next point about the centre after c; other vN are vias at no path point)
+3: *1.11 *1.27 *1.50 *1.75 *1.100 C1.1 C2.1 C3.1 C4.1 C5.1 C16.1 C17.1 C19.2 C20.2 P5.1 P9.1 Q1.2 Q2.2 Q3.2 Q4.2 R1.1 R9.2 TF1.4 U5.5 U5.6 U5.7 U5.8 U7.5 U7.6 U7.7 U7.8 U10.5 U10.6 U10.7 U10.8 U12.5 U12.6 U12.7 U12.8 U14.5 U14.6 U14.7 U14.8 U17.5 U17.6 U17.7 U17.8 U19.5 U19.6 U19.7 U19.8 U21.5 U21.6 U21.7 U21.8 U24.5 U24.6 U24.7 U24.8 U26.5 U26.6 U26.7 U26.8 U27.12 U27.13 U30.5 U30.6 U30.7 U30.8 U31.5 U31.6 U31.7 U31.8 U32.1 U33.8 U33.13 | length 4440.8
  Top Layer w10: v1(1565,4202) 1565,4172 1599,4138 C17.1@1627.32,4138 1627.32,4159.31 1635,4167 1658,4167 1665.39,4174.39 1665.39,4197.13 U33.8@1665.47,4197.21 ; U5.5@1666.57,3591.49 U5.6@1666.57,3560 U5.8@1666.57,3497.01 1666.57,3342.76 1669.47,3342.76 1739.38,3272.85 1751.15,3272.85 v1(1753,3271) ; U33.13@1770.79,4223.79 1831.44,4223.79 C16.1@1836.31,4228.66 ; C16.1@1835,4228.31 1835.34,4228.66 C16.1@1836.31,4228.66 ; C16.1@1838,4232.31 1838,4230.35 C16.1@1836.31,4228.66 ; v1(1856,4229) 1855.66,4228.66 C16.1@1836.31,4228.66 ; v1(1882,4087) 1882,4086 1882.43,4085.57 U19.6@1882.43,3682.75 U19.5@1882.43,3651.26 ; v1(2264,2811) C3.1@2286.32,2811 ; C3.1@2293.13,2815.84 2286,2808.72 2286,2794 2292,2788 2350.64,2788 2416.42,2853.78 *1.75@2449.88,2853.78 ; *1.50@2518.39,3395.51 *1.50@2518.78,3395.12 2518.78,3458.22 2512,3465 2512,3541.83 2520.86,3550.68 C1.1@2538,3550.68 ; C1.1@2537.61,3551.07 C1.1@2538,3550.68 ; v1(2538,3574) C1.1@2538,3550.68 ; C1.1@2538.16,3550.84 C1.1@2538,3550.68 ; U14.5@2848,4281 2848,4046.32 U7.8@2848.57,4045.76 2849,4045.32 v1(2849,4024) ; *1.27@2971.54,3395.12 2971.16,3395.5 2971.16,3538.02 2977.02,3543.87 2986.16,3543.87 2991,3548.72 C2.1@2991,3550.68 v1(2991,3573) ; *1.100@2992.11,2783.99 *1.100@2991.22,2784.88 2991.22,2732.78 3024,2700 3024,2638 3015.32,2629.32 C4.1@2993,2629.32 ; C4.1@2992.66,2629.66 C4.1@2993,2629.32 ; v1(2993,2564) C4.1@2993,2629.32 ; C4.1@2993.89,2628.43 C4.1@2993,2629.32 ; *1.11@3060.93,3049.82 *1.11@3060.12,3050.63 3113.63,3050.63 3118,3055 3210,3055 3216,3049 3216,3033.31 C5.1@3215.68,3033 v1(3245,3033) ; v1(3167,2323) 3167.38,2323.38 3200.19,2323.38 U31.8@3200.57,2323.76 U31.7@3200.57,2355.25 U31.6@3200.57,2386.75 U31.5@3200.57,2418.24 ; v1(3170,2017) 3170.25,2017.25 3197.93,2017.25 U30.8@3198.18,2017.5 U30.7@3198.18,2049 U30.6@3198.18,2080.5 ; U30.6@3197.94,2080.25 U30.6@3198.18,2080.5 ; U30.5@3198.18,2111.99 U30.6@3198.18,2080.5 ; R1.1@3213.68,3116 3217.83,3120.15 3236.15,3120.15 v1(3238,3122) ; R9.2@3213.69,3427 3215.65,3427 3220.5,3431.84 3220.5,3440.53 3227.34,3447.38 v1(3227.34,3450) ; v1(3485,3994) 3485,3971.81 U24.5@3485.57,3971.24 U17.5@3485.57,3817.74 U17.6@3485.57,3786.25 U17.7@3485.57,3754.75 U17.8@3485.57,3723.26 U10.5@3485.57,3664.24 U10.6@3485.57,3632.75 U10.7@3485.57,3601.25 U10.8@3485.57,3569.76 ; Q1.2@3857.4,4141.74 Q1.2@3857.4,4148.63
  Top Layer w15: C19.2@3204,2188.5 C19.2@3215.5,2200
  Top Layer w16: Q2.2@3342.4,4141.74 3342.4,4148.63 3373.77,4180 3514.07,4180 ; Q3.2@3514.07,4141.74 3514.07,4180 ; v7@3650,4180 3514.07,4180 ; v7(3650,4183) 3685.73,4183 ; Q4.2@3685.73,4141.74 3685.73,4183 ; Q1.2@3857.4,4148.63 3823.03,4183 3685.73,4183
  Top Layer w20: C19.2@3215.5,2200 C20.2@3282,2200 ; C20.2@3282,2202 3520.9,2202 3524.96,2206.06 TF1.4@3546.61,2206.06
  Top Layer w25: v1(3166,2179) 3188.59,2179 3190.91,2181.32 3196.81,2181.32 C19.2@3204,2188.5 3198.09,2188.5 3187.6,2199 v1@3167,2199
  Top Layer w40: v3(2232.02,4824.02) U27.13@2232.02,4911.65 U27.12@2332.02,4911.65
  other v1: 3166,2199
B0: *1.34 U1.9 U22.2 U23.7 U24.2 | length 1710
  Top Layer w5: *1.34@2833.74,3395.12 2833.74,3486.74 2882.8,3535.8 2882.8,3817.94 3031,3966.14 v1(3031,3986) ; U22.2@3272.43,3908.25 v1(3310.5,3908.25) U23.7@3348.57,3908.25 ; U24.2@3556.43,3908.25 3556.68,3908 v1(3583.4,3908) v1@3585,3908
  Bottom Layer w5: v1(3031,3986) 3232.75,3986 3310.63,3908.13 3583.27,3908.13 v1(3583.4,3908) 3689,3802.4 3689,3737 3711.56,3714.44 U1.9@3812.8,3714.44
B1: *1.35 U1.10 U22.1 U23.8 U24.1 | length 1741.2
  Top Layer w5: *1.35@2814.06,3395.12 2814.06,3492.06 2872.8,3550.8 2872.8,3822.08 3004.09,3953.38 3004.09,3963.76 v1(3006.17,3965.83) ; U22.1@3272.43,3876.76 v1(3311,3876.76) U23.8@3348.57,3876.76 ; U24.1@3556.43,3876.76 3557.19,3876 v1(3583.4,3876) v1@3586,3876
  Bottom Layer w5: v1(3006.17,3965.83) 3221.52,3965.83 v1@3310.6,3876.76 ; v1(3311,3876.76) 3311.38,3876.38 3583.02,3876.38 v1(3583.4,3876) 3679,3780.4 3679,3692 3711.61,3659.39 U1.10@3812.8,3659.39
B2: *1.36 U1.11 U15.4 U16.5 U17.4 | length 1753.6
  Top Layer w5: *1.36@2794.37,3395.12 2794.37,3495.37 2862.8,3563.8 2862.8,3836.61 v1(2968.59,3942.41) ; U15.4@3272.43,3817.74 v1(3310.5,3817.74) U16.5@3348.57,3817.74 ; U17.4@3556.43,3817.74 3583.74,3817.74 v1@3584,3818
  Bottom Layer w5: v1(2968.59,3942.41) 3185.84,3942.41 v1(3310.5,3817.74) 3310.63,3817.87 3583.27,3817.87 v1(3583.4,3818) 3667.08,3734.32 3667.08,3655.92 3718.66,3604.34 U1.11@3812.8,3604.34
B3: *1.89 U1.12 U15.3 U16.6 U17.3 | length 2320.3
  Top Layer w5: *1.89@2774.68,2784.88 2774.68,3301.71 2778,3305.03 v1(2778,3309) ; U15.3@3272.43,3786.25 v1(3310.5,3786.25) U16.6@3348.57,3786.25 ; U17.3@3556.43,3786.25 3556.92,3785.76 v1(3583.4,3785.76)
  Bottom Layer w5: v1(2778,3309) 2803,3309 2851,3261 3102,3261 3160,3319 3160,3771 3175.25,3786.25 v1(3310.5,3786.25) 3310.74,3786 3583.15,3786 v1(3583.4,3785.76) 3657,3712.16 3657,3616 3723.71,3549.29 U1.12@3812.8,3549.29
B4: *1.90 U1.13 U15.2 U16.7 U17.2 | length 2275.4
  Top Layer w5: v1(2793,3283) 2793,3279.03 2784.68,3270.71 2784.68,2851.32 2794.37,2841.63 *1.90@2794.37,2784.88 ; U15.2@3272.43,3754.75 v1(3310.5,3754.75) U16.7@3348.57,3754.75 ; U17.2@3556.43,3754.75 3556.68,3755 v1(3583.4,3755) v1@3584,3755
  Bottom Layer w5: v1(2793,3283) 2814.86,3283 2846.86,3251 3106.14,3251 3170,3314.86 3170,3737 3187,3754 3309.75,3754 v1(3310.5,3754.75) 3310.62,3754.88 3583.27,3754.88 v1(3583.4,3755) 3647,3691.4 3647,3573.8 3726.55,3494.24 U1.13@3812.8,3494.24
B5: *1.91 U1.14 U15.1 U16.8 U17.1 | length 2232.4
  Top Layer w5: v1(2802.03,3254.16) 2802.03,3251.23 2794.68,3243.89 2794.68,2855.46 2814.06,2836.09 *1.91@2814.06,2784.88 ; U15.1@3272.43,3723.26 v1(3310.5,3723.26) U16.8@3348.57,3723.26 ; U17.1@3556.43,3723.26 3557.18,3724 v1(3583.4,3724) v1@3584,3724
  Bottom Layer w5: v1(2802.03,3254.16) 2815.19,3241 3110.28,3241 3180,3310.72 3180,3703 3200.26,3723.26 v1(3310.5,3723.26) 3310.87,3723.63 3583.03,3723.63 v1(3583.4,3724) 3636,3671.4 3636,3528 3724.81,3439.19 U1.14@3812.8,3439.19
B6: *1.92 U1.15 U8.4 U9.5 U10.4 | length 2105.9
  Top Layer w5: v1(2812.03,3213.66) 2812.03,3210.73 2804.68,3203.39 2804.68,2859.6 2833.74,2830.54 *1.92@2833.74,2784.88 ; U8.4@3272.43,3664.24 v1(3310.5,3664.24) U9.5@3348.57,3664.24 ; U10.4@3556.43,3664.24 3556.68,3664 v1(3583.4,3664) v1@3584,3664
  Bottom Layer w5: v1(2812.03,3213.66) 2814.96,3213.66 2822.3,3221 3118.57,3221 3200,3302.43 3200,3514 3250,3564 3250,3641 3273.24,3664.24 v1(3310.5,3664.24) 3310.62,3664.12 3583.28,3664.12 v1(3583.4,3664) 3624,3623.4 3624,3477 3716.85,3384.15 U1.15@3812.8,3384.15
B7: *1.93 U1.16 U8.3 U9.6 U10.3 | length 2080.3
  Top Layer w5: v1(2822.03,3186) 2822.03,2887.97 2853.43,2856.57 *1.93@2853.43,2784.88 ; U8.3@3272.43,3632.75 v1(3310.5,3632.75) U9.6@3348.57,3632.75 ; U10.3@3556.43,3632.75 3556.68,3633 v1(3583.4,3633) v1@3585,3633
  Bottom Layer w5: v1(2822.03,3186) 2847.03,3211 3122.71,3211 3210,3298.29 3210,3509.86 3260,3559.86 3260,3610 3281,3631 3308.75,3631 v1(3310.5,3632.75) 3310.63,3632.87 3583.27,3632.87 v1(3583.4,3633) 3610.74,3605.66 3610.74,3424.26 3705.9,3329.1 U1.16@3812.8,3329.1
B8: *1.95 U1.17 U8.2 U9.7 U10.2 | length 2089.2
  Top Layer w5: v1(2854.5,3187.5) 2853.5,3187.5 2833,3167 2833,2891.14 2892.8,2831.35 *1.95@2892.8,2784.88 ; U8.2@3272.43,3601.25 v1(3310.5,3601.25) U9.7@3348.57,3601.25 ; U10.2@3556.43,3601.25 3557.18,3602 v1(3583.4,3602) v1@3584,3602
  Bottom Layer w5: v1(2854.5,3187.5) 2865,3198 3183,3198 3283,3298 3283,3573.75 v1(3310.5,3601.25) 3310.87,3601.63 3583.02,3601.63 v1(3583.4,3602) 3600.74,3584.66 3600.74,3378.26 3704.95,3274.05 U1.17@3812.8,3274.05
B9: *1.96 U1.18 U8.1 U9.8 U10.1 | length 2069.7
  Top Layer w5: v1(2854,3161) 2852.93,3161 2843,3151.07 2843,2895.28 2909.07,2829.21 2909.07,2788.29 *1.96@2912.48,2784.88 ; U8.1@3272.43,3569.76 v1(3310.5,3569.76) U9.8@3348.57,3569.76 ; U10.1@3556.43,3569.76 3557.19,3569 v1(3583.4,3569) v1@3584,3569
  Bottom Layer w5: v1(2854,3161) 2881,3188 3187.14,3188 3293,3293.86 3293,3552.26 v1(3310.5,3569.76) 3310.88,3569.38 3583.02,3569.38 v1(3583.4,3569) 3583.4,3508.6 3583.4,3345.6 3710,3219 U1.18@3812.8,3219
B12: *1.51 U1.22 U25.5 U26.4 | length 944.2
  Top Layer w5: U26.4@1734.43,3437.24 U25.5@1809.18,3437.24 ; v1(2371,3325) 2371.61,3325.61 2449.27,3325.61 *1.51@2449.88,3326.22
  Bottom Layer w5: U1.22@1650,3384.32 1712.99,3384.32 1763.86,3435.19 1769.19,3435.19 v1(1772,3438) 1773,3437 1809,3437 1913,3333 2336.14,3333 2344.14,3325 v1(2371,3325)
B13: *1.52 U1.21 U25.6 U26.3 | length 958.4
  Top Layer w5: U26.3@1734.43,3405.75 U25.6@1809.18,3405.75 ; v1(2392,3306) 2392.27,3306.27 2449.61,3306.27 *1.52@2449.88,3306.54
  Bottom Layer w5: U1.21@1650,3329.27 1712.99,3329.27 1740,3356.28 1740,3374 v1(1772,3406) 1772.39,3405.61 1812.39,3405.61 1895,3323 2332,3323 2347.34,3307.66 2390.34,3307.66 v1(2392,3306)
B14: *1.53 U1.20 U25.7 U26.2 | length 977.4
  Top Layer w5: U26.2@1734.43,3374.25 U25.7@1809.18,3374.25 ; v1(2372.89,3288.41) 2373.68,3287.63 2449.1,3287.63 *1.53@2449.88,3286.85
  Bottom Layer w5: U1.20@1650,3274.22 1712.99,3274.22 1750,3311.23 1750,3353 v1(1772,3375) 1772.78,3374.22 1815.78,3374.22 1877,3313 2327,3313 2351.59,3288.41 v1(2372.89,3288.41)
B15: *1.54 U1.19 U25.8 U26.1 | length 1012.2
  Top Layer w5: U26.1@1734.43,3342.76 U25.8@1809.18,3342.76 ; v1(2393,3267) 2393.17,3267.17 *1.54@2449.88,3267.17
  Bottom Layer w5: U1.19@1650,3219.17 1740.17,3219.17 1773.34,3252.34 1773.34,3341.66 v1@1772.17,3342.83 ; v1(1772,3343) v1@1772.17,3342.83 ; v1(2393,3267) 2390.19,3269.81 2383.99,3269.81 2382.73,3271.07 2353.93,3271.07 2322,3303 1860,3303 1820.17,3342.83 v1@1772.17,3342.83
CTL_LCD_LED: *1.68 U28.6 U29.3 | length 2824.3
  Top Layer w5: *1.68@2449.88,2991.57 2549.57,2991.57 2551.93,2993.93 2556.07,2993.93 v1(2558,2992) ; U28.6@3830.75,3881.43 3830.75,3858.93 3833.68,3856 4016.03,3856 4025.03,3865 v1(4029,3865)
  Top Layer w10: U28.6@3830.75,3881.43 U29.3@3830.75,3961.57
  Bottom Layer w5: v1(2558,2992) 2583,2992 2593,3002 3044.86,3002 3083.86,2963 4013.14,2963 4056,3005.86 4056,3783.86 4026.34,3813.52 4026.34,3862.34 v1(4029,3865)
CTL_M5STAMP: *1.77 U28.8 U29.1 | length 2966.1
  Top Layer w5: *1.77@2538.46,2784.88 2538.73,2785.15 2538.73,2920.73 v1(2539,2921) ; U28.8@3767.76,3881.43 3767.76,3856.24 3788,3836 3985,3836 4002,3819 4043,3819 v1(4058,3834)
  Top Layer w10: U28.8@3767.76,3881.43 U29.1@3767.76,3961.57
  Bottom Layer w5: v1(2539,2921) 3015,2921 3037,2943 4021.43,2943 4076,2997.57 4076,3792.14 4058,3810.14 v1(4058,3834)
CTL_MIC: *1.69 U28.5 U29.4 | length 2843.4
  Top Layer w5: *1.69@2449.88,2971.89 2585.89,2971.89 v1(2587,2973) ; U28.5@3862.24,3881.43 3862.24,3882.67 3870.57,3891 v1(4052,3891)
  Top Layer w10: U28.5@3862.24,3881.43 U29.4@3862.24,3961.57
  Bottom Layer w5: v1(2587,2973) 2606,2992 3040.72,2992 3079.72,2953 4017.28,2953 4066,3001.72 4066,3788 4036.34,3817.66 4036.34,3847.82 4052,3863.47 v1(4052,3891)
CTL_MOTOR: *1.67 U28.7 U29.2 | length 2797.4
  Top Layer w5: *1.67@2449.88,3011.26 2531.26,3011.26 v1(2532,3012) ; U28.7@3799.25,3881.43 3799.25,3850.93 3804.18,3846 3998.73,3846 4006.07,3838.66 v1(4009,3838.66)
  Top Layer w10: U28.7@3799.25,3881.43 U29.2@3799.25,3961.57
  Bottom Layer w5: v1(2532,3012) 3049,3012 3088,2973 4009,2973 4046,3010 4046,3779.72 4009,3816.72 v1(4009,3838.66)
D3: *1.84 U1.27 U18.5 U19.4 | length 1982.5
  Top Layer w5: U18.5@1737.43,3651.26 v1(1774.5,3651.26) U19.4@1811.57,3651.26 ; v1(2675,3244.34) 2675.63,3243.71 2675.63,2785.51 *1.84@2676.26,2784.88
  Bottom Layer w5: U1.27@1650,3659.56 1650.44,3660 1761.78,3660 1770.53,3651.26 2662.74,3651.26 2699,3615 2699,3285 2675.68,3261.68 2675.68,3245.03 v1(2675,3244.34)
D4: *1.85 U1.28 U18.6 U19.3 | length 2012.3
  Top Layer w5: U18.6@1737.43,3682.75 U19.3@1811.57,3682.75 ; *1.85@2695.94,2784.88 2695.94,3255.94 v1(2697,3257)
  Bottom Layer w5: U1.28@1650,3714.61 1742.39,3714.61 v1(1774,3683) 1858.34,3683 1909.2,3683 1930.94,3661.26 2666.89,3661.26 2709,3619.14 2709,3269.53 2697,3257.53 v1(2697,3257)
D5: *1.86 U1.29 U18.7 U19.2 | length 2043.6
  Top Layer w5: U18.7@1737.43,3714.25 U19.2@1811.57,3714.25 ; *1.86@2715.63,2784.88 2715.63,3237 2719,3240.37 v1(2719,3244.34)
  Bottom Layer w5: U1.29@1650,3769.66 1662.38,3757.28 1732.72,3757.28 v1(1775,3715) 1891.56,3715 1935.31,3671.26 2671.03,3671.26 2719,3623.28 v1(2719,3244.34)
D6: *1.87 U1.30 U18.8 U19.1 | length 2091.9
  Top Layer w5: U18.8@1737.43,3745.74 U19.1@1811.57,3745.74 ; *1.87@2735.32,2784.88 2737.66,2787.22 v1(2737.66,3262.82)
  Bottom Layer w5: U1.30@1650,3824.71 1663.25,3811.46 1726.54,3811.46 1741,3797 1741,3780 v1(1774,3747) 1875,3747 1940.74,3681.26 2675.17,3681.26 2729,3627.43 2729,3275.45 2737.66,3266.79 v1(2737.66,3262.82)
D7: *1.88 U1.31 U11.5 U12.4 | length 2095.5
  Top Layer w5: U11.5@1740.43,3805.51 U12.4@1811.57,3805.51 ; v1(2338,3405) 2339.33,3406.33 2339.33,3697.27 v1(2340.66,3698.6) ; v1(2559.14,3294) 2731,3294 2755,3270 *1.88@2755,2784.88
  Bottom Layer w5: U1.31@1650,3879.76 1712.99,3879.76 1741,3851.75 1741,3851 1750,3842 1750,3832.63 v1(1776.82,3805.81) 1883.19,3805.81 1990.4,3698.6 v1(2340.66,3698.6) ; v1(2338,3405) 2448.14,3405 v1(2559.14,3294)
D8: *1.55 U1.32 U11.6 U12.3 | length 1541.3
  Top Layer w5: U11.6@1740.43,3837 U12.3@1811.57,3837 ; v1(2347.84,3377.16) 2365.34,3394.66 v1(2365.34,3698.6) ; *1.55@2449.88,3247.48 2501.52,3247.48 v1(2502,3247)
  Bottom Layer w5: U1.32@1650,3934.81 1652.12,3932.69 1733.31,3932.69 1776,3890 v1(1776,3837) 1797.19,3815.81 1887.33,3815.81 1987.2,3715.94 2348,3715.94 v1(2365.34,3698.6) ; v1(2347.84,3377.16) 2434.84,3377.16 2502,3310 v1(2502,3247)
E0: *1.97 U1.33 U20.5 U21.4 | length 5220.8
  Top Layer w5: U20.5@1739.43,3959.76 U21.4@1811.57,3959.76 ; v1(2931,2837) 2931.58,2836.42 2931.58,2785.46 *1.97@2932.17,2784.88
  Bottom Layer w5: U1.33@1650,3989.85 1653.16,3986.69 1733.31,3986.69 1758.66,3961.34 1776,3961.34 1834.23,3961.34 1954,4081.12 2173.88,4301 4028.57,4301 4086,4243.57 4086,3796.28 4086,2993.43 4025.57,2933 3622.43,2933 3573.43,2884 2956.47,2884 2931,2858.53 v1(2931,2837) v1@2931.89,2837.89
  other v1: 1776,3960
E1: *1.98 U1.34 U20.6 U21.3 | length 5226.6
  Top Layer w5: U20.6@1739.43,3991.25 U21.3@1811.57,3991.25 ; *1.98@2951.85,2784.88 2952.04,2785.07 2952.04,2855.04 v1(2952.23,2855.23)
  Bottom Layer w5: U1.34@1650,4044.9 1660.21,4034.69 1733.31,4034.69 v1(1776,3992) 1850.74,3992 1941.87,4083.13 2169.74,4311 4032.72,4311 4096,4247.72 4096,3800.43 4096,2989.29 4029.71,2923 3626.57,2923 3577.57,2874 2995,2874 2976.23,2855.23 v1(2952.23,2855.23)
E2: *1.1 U1.35 U20.7 U21.2 | length 5092.1
  Top Layer w5: U20.7@1739.43,4022.75 U21.2@1811.57,4022.75 ; *1.1@3060.12,2853.78 *1.1@3067.19,2853.78 ; *1.1@3070.59,2850.37 *1.1@3067.19,2853.78 ; v1(3130,2855) 3129.39,2854.39 3067.8,2854.39 *1.1@3067.19,2853.78
  Bottom Layer w5: U1.35@1650,4099.95 1712.99,4099.95 1749,4063.94 1749,4050 v1(1776,4023) 1867.6,4023 2165.6,4321 4036.86,4321 4106,4251.86 4106,3804.57 4106,2985.15 4033.85,2913 3630.71,2913 3581.71,2864 3142.97,2864 3133.97,2855 v1(3130,2855)
E3: *1.2 U1.36 U20.8 U21.1 | length 5163.6
  Top Layer w5: U20.8@1739.43,4054.24 U21.1@1811.57,4054.24 ; *1.2@3060.12,2873.46 3136.06,2873.46 3169,2840.53 v1(3169,2840)
  Bottom Layer w5: U1.36@1650,4155 1650.31,4154.69 1733.31,4154.69 1776,4112 v1(1776,4054) 1776.46,4053.54 1884,4053.54 2161.46,4331 4041,4331 4116,4256 4116,3808.71 4116,2981.01 4037.99,2903 3634.85,2903 3585.85,2854 3183,2854 v1(3169,2840)
E4: *1.3 U1.1 U13.5 U14.4 | length 2925.5
  Top Layer w5: v1(2918.52,3296.57) 2918.52,2957.2 2982.57,2893.15 *1.3@3060.12,2893.15 ; U14.4@2919.43,4280.24 v1(2958.78,4280.24) U13.5@2998.13,4280.24
  Bottom Layer w5: v1(2918.52,3296.57) 2918.52,3910.2 2899.72,3929 2730.72,3929 2675,3984.72 2675,4222.14 2711.61,4258.75 2937.29,4258.75 v1(2958.78,4280.24) 3001.78,4237.25 3500.17,4237.25 3582.6,4154.83 U1.1@3812.8,4154.83
E5: *1.4 U1.2 U13.6 U14.3 | length 2902
  Top Layer w5: U14.3@2919.43,4248.75 v1(2959,4248.75) U13.6@2998.13,4248.75 ; v1(2944,3295) 2944,3292 2928.52,3276.52 2928.52,2961.34 2977.02,2912.83 *1.4@3060.12,2912.83
  Bottom Layer w5: v1(2944,3295) 2944,3295.61 2928.52,3311.09 2928.52,3914.34 2903.86,3939 2734.86,3939 2685,3988.86 2685,4218 2715.75,4248.75 v1(2959,4248.75) 2980.5,4227.25 3496.03,4227.25 3623.51,4099.78 U1.2@3812.8,4099.78
E6: *1.5 U1.3 U13.7 U14.2 | length 2896.7
  Top Layer w5: U14.2@2919.43,4217.25 v1(2958.78,4217.25) U13.7@2998.13,4217.25 ; v1(2970,3294) 2938.52,3262.52 2938.52,2965.48 2971.48,2932.52 *1.5@3060.12,2932.52
  Bottom Layer w5: v1(2970,3294) 2938.52,3325.48 2938.52,3918.48 2908,3949 2739,3949 2695,3993 2695,4213.86 2719.89,4238.75 2937.29,4238.75 v1(2958.78,4217.25) 3491.89,4217.25 3664.41,4044.73 U1.3@3812.8,4044.73
E7: *1.37 U1.4 U13.8 U14.1 | length 2066.8
  Top Layer w5: *1.37@2774.68,3395.12 2774.68,3498.12 2849,3572.43 2849,3986.28 2790,4045.28 2790,4168.37 v1(2774.68,4183.69) ; U14.1@2919.43,4185.76 v1(2958.78,4185.76) U13.8@2998.13,4185.76
  Bottom Layer w5: v1(2774.68,4183.69) 2775.72,4184.72 2957.75,4184.72 v1(2958.78,4185.76) 2980.28,4207.25 3487.75,4207.25 3660.27,4034.73 3705.32,3989.68 U1.4@3812.8,3989.68